# Altium PCB HAT_ID02_IMU.PcbDoc
Units mil, origin at the board's own origin, x right, y up, seen from the top; angles counter-clockwise.
Board outline 2559.11 x 2204.72 mil, 2 copper layers (Top Layer, Bottom Layer); 30 components, 28 nets, 144 pads, 22 vias.
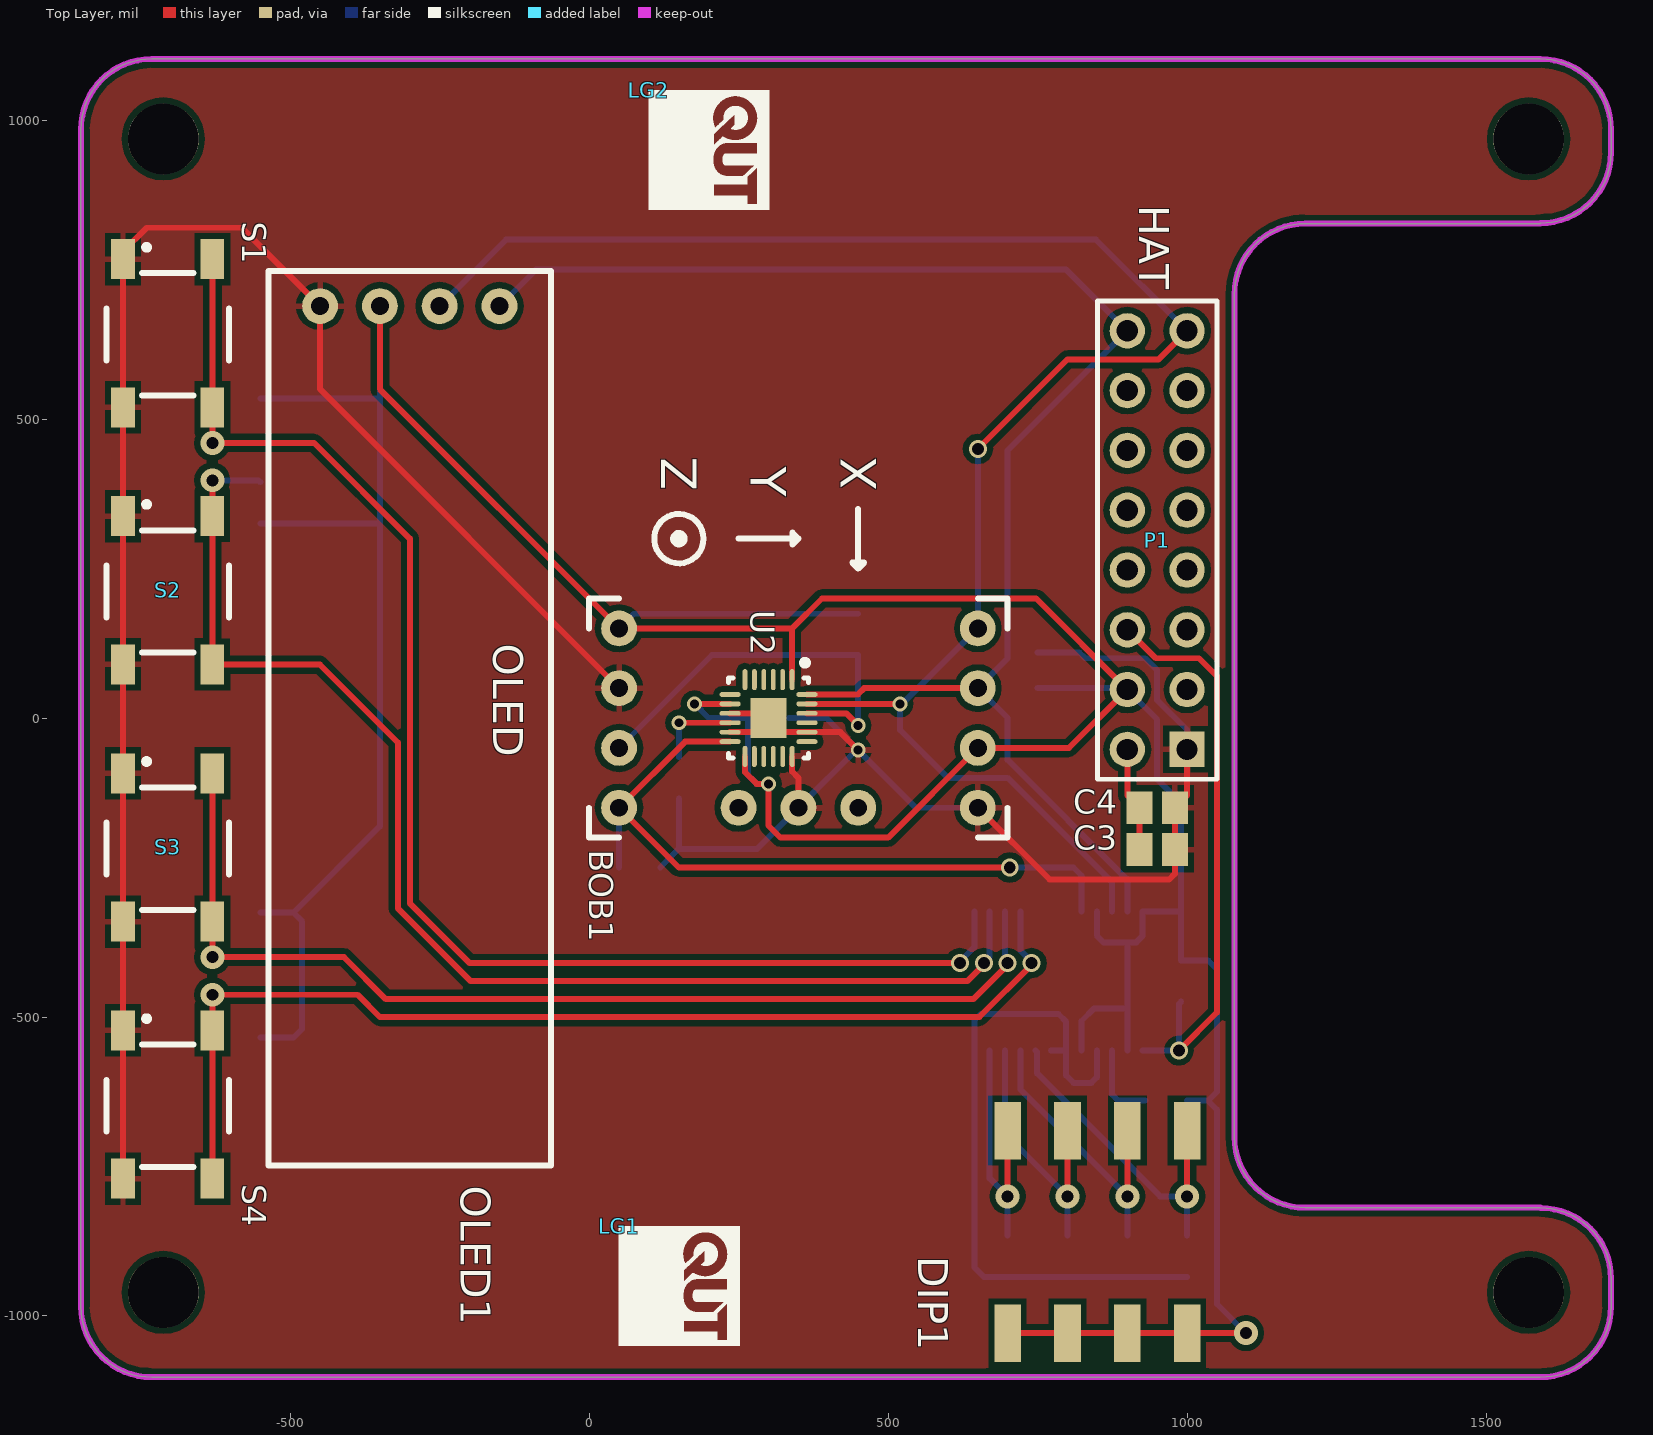
[diagram p0: Top Layer view]
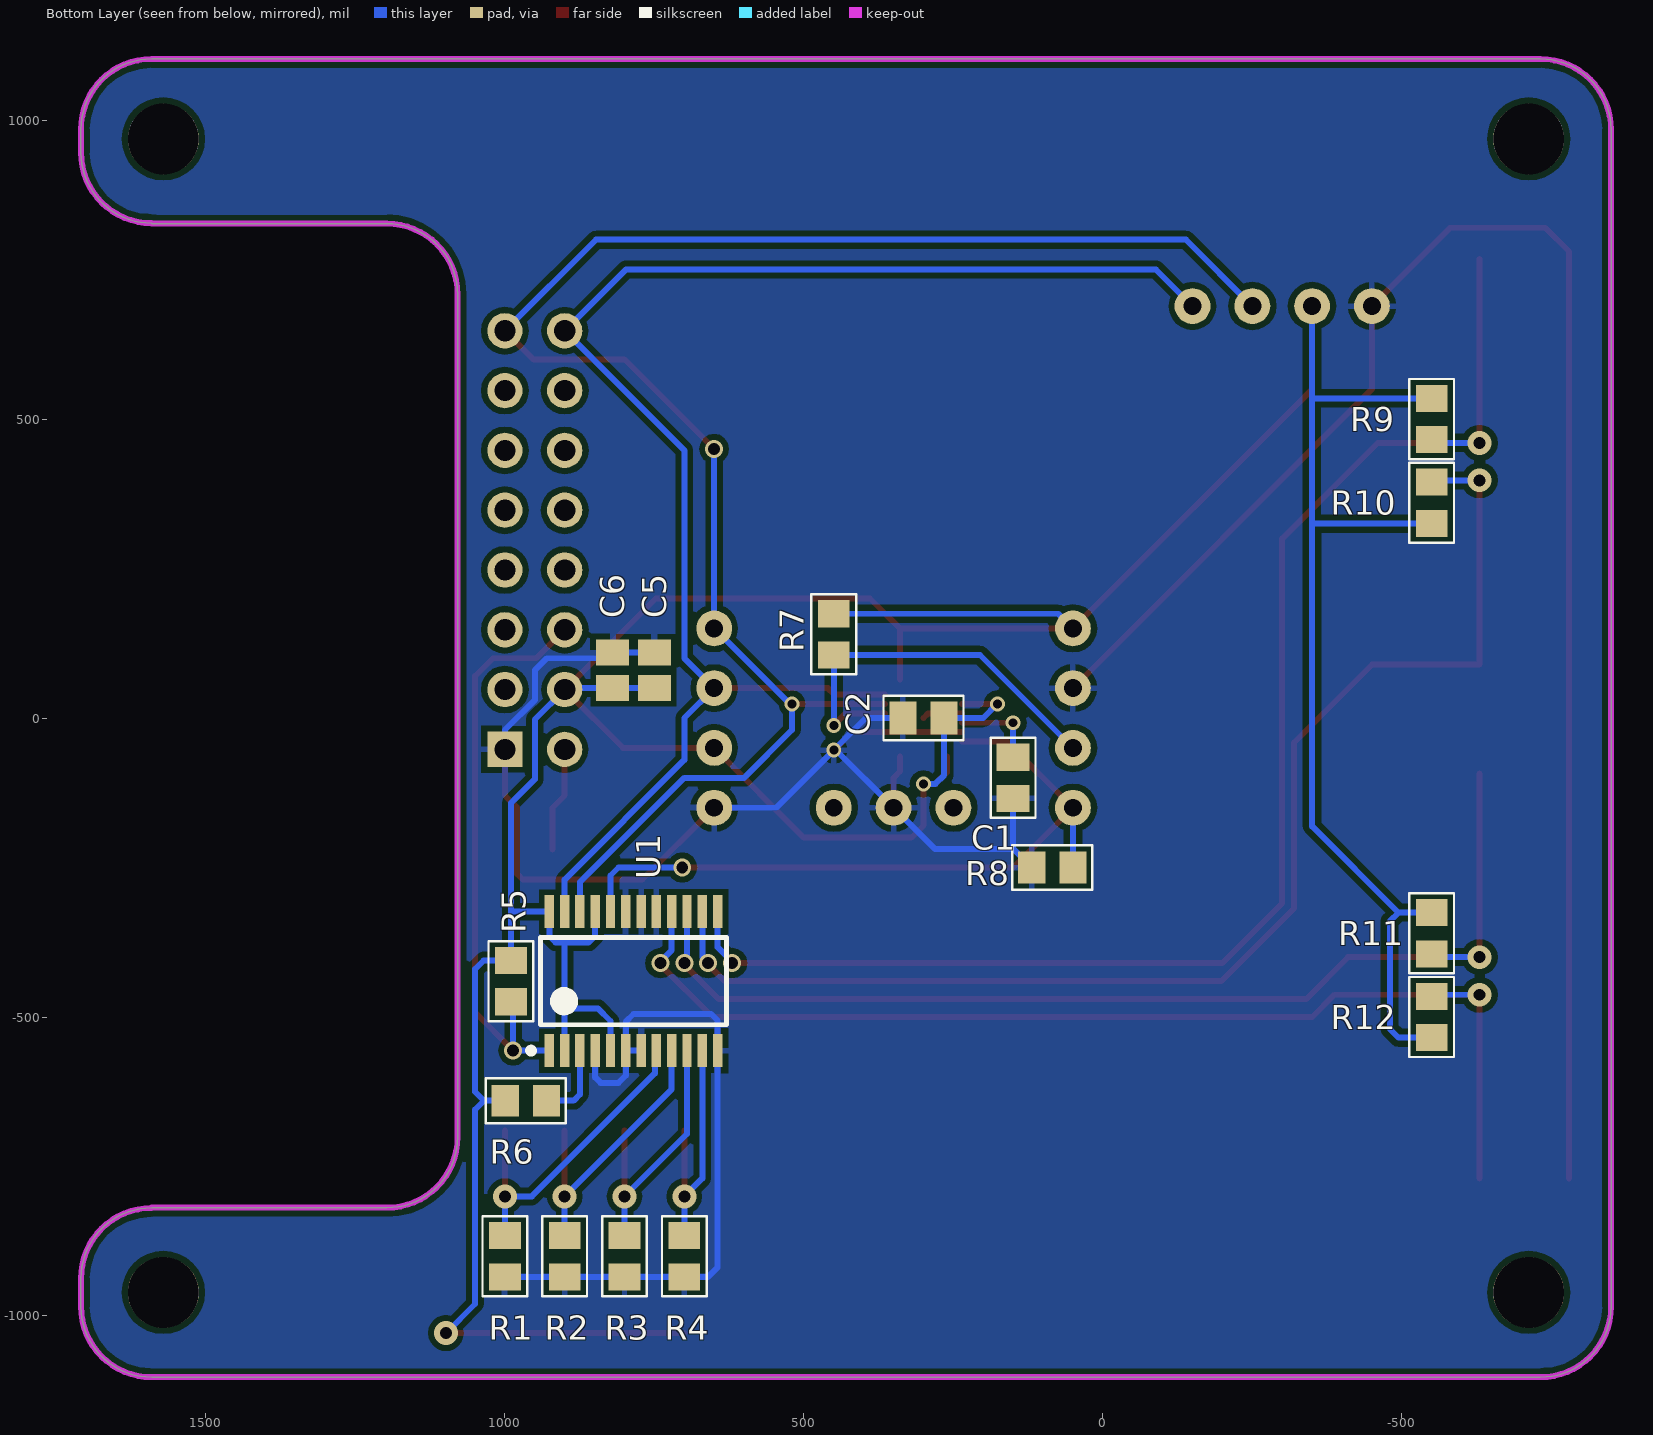
[diagram p1: Bottom Layer view, seen from below]
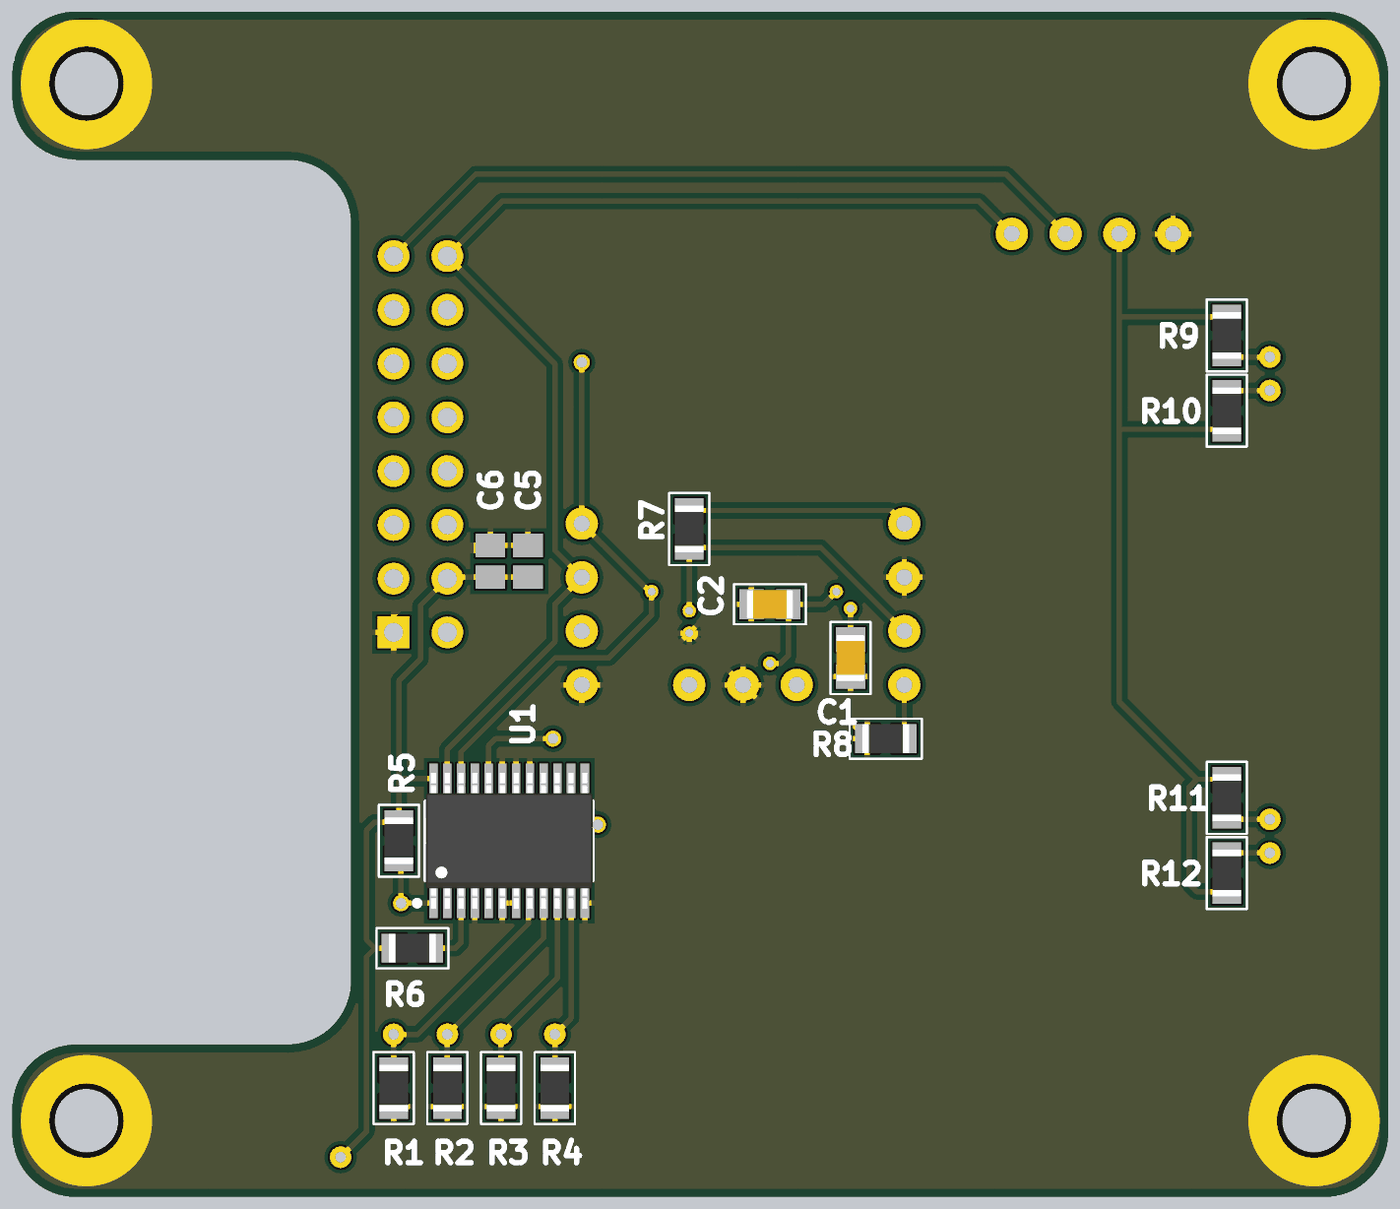
[diagram p2: 3D render of the assembled board from below, using the file's embedded part models]

## Layer stack, top to bottom
Top Solder: solder mask 0.4, Solder Resist, Dk 3.5
Top Layer: signal copper 1.4
Dielectric 1: dielectric 12.6, FR-4, Dk 4.8
Bottom Layer: signal copper 1.4
Bottom Solder: solder mask 0.4, Solder Resist, Dk 3.5

## Board outline
-850,-984.25 -850,984.25 cw(c-731.89,984.25) -731.89,1102.36 1591,1102.36 cw(c1591,984.25) 1709.11,984.25 1709.06,984.25 1709.06,945.75 cw(c1590.94,945.75) 1590.94,827.64 1590.94,826.77 1197.24,826.77 ccw(c1197.24,708.66) 1079.13,708.66 1079.13,-700.79 ccw(c1197.24,-700.79) 1197.24,-818.9 1590.94,-818.9 1590.94,-819.25 cw(c1590.94,-937.36) 1709.06,-937.36 1709.06,-984.25 cw(c1590.94,-984.25) 1590.94,-1102.36 -731.89,-1102.36 cw(c-731.89,-984.25)

## Design rules (kind name [scope] priority, off if disabled: settings)
Clearance [All] p1: gap=10
PolygonConnect [All] p1: connectstyle=Relief reliefconductorwidth=10 reliefentries=4 polygonreliefangle="90 Angle" airgapwidth=10
RoutingVias [All] p1: holewidth=28 width=50 viastyle="Through Hole" minholewidth=28 minwidth=50 maxholewidth=28 maxwidth=50
SolderMaskExpansion [All] p1: expansion=4
Width [All] p1: maxlimit=20 minlimit=8 preferedwidth=10
30 further rules are at their usual default settings.

## Components (designator, comment, footprint, x,y, rotation, side; value= is the part's Value field where it differs from the comment)
BOB1 "BOB MPU-9250" "BOB MPU-9250" 350,-150 r270 top locked
C1 "CAP SMD" CAPC2012X07N 150,-100 r90 bottom
C2 "CAP SMD" CAPC2012X07N 300,0 r180 bottom
C3 "CAP SMD" C0805 950,-220 r180 top
C4 "CAP SMD" C0805 950,-150 r180 top
C5 "CAP SMD" C0805 750,80 r270 bottom
C6 "CAP SMD" C0805 820,80 r270 bottom
DIP1 "DIP Switch (4way)" "DIP SMD" 1000,-1028.58 r0 top locked
LG1 "QUT_Logo" QUT_Logo 50,-850 r270 top
LG2 "QUT_Logo" QUT_Logo 100,1050 r270 top
OLED1 "OLED" OLED -300,688.98 r270 top locked
P1 "HAT" HDR2X8 1000,-52.36 r90 top locked
R1 "RES SMD" RESC2012X07N 1000,-900 r90 bottom
R2 "RES SMD" RESC2012X07N 900,-900 r90 bottom
R3 "RES SMD" RESC2012X07N 800,-900 r90 bottom
R4 "RES SMD" RESC2012X07N 700,-900 r90 bottom
R5 "RES SMD" RESC2012X07N 990,-440 r90 bottom
R6 "RES SMD" RESC2012X07N 965,-640 r0 bottom
R7 "RES SMD" RESC2012X07N 450,140 r90 bottom
R8 "RES SMD" RESC2012X07N 84.45,-250 r180 bottom
R9 "RES SMD" RESC2012X07N -550,500 r270 bottom
R10 "RES SMD" RESC2012X07N -550,360 r90 bottom
R11 "RES SMD" RESC2012X07N -550,-360 r270 bottom
R12 "RES SMD" RESC2012X07N -550,-500 r90 bottom
S1 "B1" E-SWITCH-TL3342 -779.61,767.64 r270 top
S2 "B1" E-SWITCH-TL3342 -779.61,337.64 r270 top
S3 "B1" E-SWITCH-TL3342 -779.61,-92.36 r270 top
S4 "B1" E-SWITCH-TL3342 -779.61,-522.36 r270 top
U1 "PCA6416A" TSOP65P640X110-24N 785,-440 r90 bottom
U2 "MPU-9250" INSE-QFN-24-1700X1540TP_M 300,0 r270 top locked

## Footprints (in the part's own frame and the unit in brackets; to place one, negate y for a bottom-side part, rotate by r counter-clockwise, add the part's x,y. Pads: shape width x height; smd on the part's side, far side on the other; paste and mask are expansions set on the pad)
"BOB MPU-9250" [mil]
  round 60 hole 30: 0(-300,300) 1(-200,300) 2(-100,300) 3(0,300) 4(0,100) 5(0,0) 6(0,-100) 7(0,-300) 8(-100,-300) 9(-200,-300) 10(-300,-300)
  silkscreen extent -350,-350 50,350
C0805 [mm] "Chip Capacitor, Body 2.0x1.3mm, IPC High Density"
  rect 1.1x1.4 smd: 1(-0.75,0) 2(0.75,0)
  body extent -1.1,-0.72 1.1,0.72, height 1.4
CAPC2012X07N [mm] "Chip Capacitor, 2-Leads, Body 2.00x1.25mm, IPC Medium Density"
  rect 1.15x1.4 smd: 1(-0.875,0) 2(0.875,0)
  silkscreen extent -1.7,-0.95 1.7,0.95, body extent -1.1,-0.68 1.1,0.67, height 0.7
"DIP SMD" [mm] "Digikey CT2194MST-ND"
  rect 1.13x2.44 smd: 0(-7.62,0) 1(-5.08,0) 2(-2.54,0) 3(0,0) 4(0,8.6) 5(-2.54,8.6) 6(-5.08,8.6) 7(-7.62,8.6)
E-SWITCH-TL3342 [mm]
  rect 1.7x1 smd: 1(0,0) 2(6.3,0) 3(0,3.8) 4(6.3,3.8)
  silkscreen extent -0.6,-0.7 5.8,4.5, body extent 0,-0.7 6.4,4.5, height 1.54
HDR2X8 [mm] "Connector; Header; 8x2 Position"
  rect 1.5x1.5 hole 0.9: 1(0,0)
  round 1.5 hole 0.9: 2(0,2.54) 3(2.54,0) 4(2.54,2.54) 5(5.08,0) 6(5.08,2.54) 7(7.62,0) 8(7.62,2.54) 9(10.16,0) 10(10.16,2.54) 11(12.7,0) 12(12.7,2.54) 13(15.24,0) 14(15.24,2.54) 15(17.78,0) 16(17.78,2.54)
  silkscreen extent -1.27,-1.27 19.05,3.81
INSE-QFN-24-1700X1540TP_M [mm] "QFN, 24-Leads, Body 3.1x3.1mm, Pitch 0.40mm, Thermal Pad 1.54x1.70mm, IPC Low Density"
  oval 0.9x0.2 smd: 1(-1.632,1) 2(-1.632,0.6) 3(-1.632,0.2) 4(-1.632,-0.2) 5(-1.632,-0.6) 6(-1.632,-1) 13(1.632,-1) 14(1.632,-0.6) 15(1.632,-0.2) 16(1.632,0.2) 17(1.632,0.6) 18(1.632,1)
  oval 0.2x0.9 smd: 7(-1,-1.632) 8(-0.6,-1.632) 9(-0.2,-1.632) 10(0.2,-1.632) 11(0.6,-1.632) 12(1,-1.632) 19(1,1.632) 20(0.6,1.632) 21(0.2,1.632) 22(-0.2,1.632) 23(-0.6,1.632) 24(-1,1.632)
  rect 1.7x1.54 smd: 25(0,0)
  silkscreen extent -2.47,-1.7 1.7,1.7, body extent -1.55,-1.55 1.55,1.55, height 1.05
OLED [mil]
  round 60 hole 30: 1(0,-150) 2(0,-50) 3(0,50) 4(0,150)
  silkscreen extent -59,-236 1437,236
QUT_Logo [mil]
  silkscreen extent 0,0 200,202
RESC2012X07N [mm] "Chip Resistor, 2-Leads, Body 2.00x1.25mm, IPC Medium Density"
  rect 1.15x1.35 smd: 1(-0.875,0) 2(0.875,0)
  silkscreen extent -1.7,-0.95 1.7,0.95, body extent -1.1,-0.67 1.1,0.67, height 0.7
TSOP65P640X110-24N [mm] "TSOP, 24-Leads, Body 7.80x4.40mm, Pitch 0.65mm, IPC Medium Density"
  rect 1.4x0.4 smd: 1(-2.95,3.575) 2(-2.95,2.925) 3(-2.95,2.275) 4(-2.95,1.625) 5(-2.95,0.975) 6(-2.95,0.325) 7(-2.95,-0.325) 8(-2.95,-0.975) 9(-2.95,-1.625) 10(-2.95,-2.275) 11(-2.95,-2.925) 12(-2.95,-3.575) 13(2.95,-3.575) 14(2.95,-2.925) 15(2.95,-2.275) 16(2.95,-1.625) 17(2.95,-0.975) 18(2.95,-0.325) 19(2.95,0.325) 20(2.95,0.975) 21(2.95,1.625) 22(2.95,2.275) 23(2.95,2.925) 24(2.95,3.575)
  silkscreen extent -3.07,-3.95 1.85,4.47, body extent -3.2,-3.95 3.2,3.95, height 1.1

## Part data
C1 C2 C3 C4 C5 C6: "Surface mount capacitor"
P1: library part "Header 8X2", "Header, 8-Pin, Dual row"
R1 R2 R3 R4 R5 R6 R7 R8 R9 R10 R11 R12: "0805 surface mount resistor"
S1 S2 S3 S4: library part E-SWITCH-PUSHBUTTON, "TL 3342 surface mount pushbutton"
U1: library part PCA6416APW, "Low-voltage translating 16-bit I2C I/O port expander"
U2: library part CMP-2100-03657-1, "9-axis MotionTracking device, 2.4 to 3,6 V, -40 to 85 degC, 24-Pin QFN, RoHS, Tape and Reel"

## Free pads (board coordinates)
  round 118.11 hole 118.11 unplated mask+62.99: 0(-712.2,-960.63) 1(1571.26,-960.63) 2(1571.26,968.5) 3(-712.2,968.5)

## Via types
v1: diameter 40, hole 20, Top Layer to Bottom Layer, 9 vias
v2: diameter 30, hole 20, Top Layer to Bottom Layer, 7 vias
v3: diameter 25, hole 15, Top Layer to Bottom Layer, 6 vias

## Nets (pads, with @x,y where several pads share a name; then routed paths per layer and width w, separated by ;. In a path a pad name is that pad's centre, name@x,y a point inside that pad or via, vN(x,y) a via of type N, cw(c..) or ccw(c..) an arc to the next point about the centre after c; other vN are vias at no path point)
3V3: BOB1.2 BOB1.10 C2.2 C5.2 C6.2 DIP1.0 DIP1.1 DIP1.2 DIP1.3 OLED1.2 P1.4 R5.2 R6.2 R7.2 R9.1 R10.1 R11.1 R12.1 U1.2 U1.5 U1.21 U1.24 U2.1 U2.8 U2.13 | length 7419.3
  Top Layer w10: OLED1.2 -350,550 BOB1.10 339.37,150 ; v3(176.38,23.62) U2.8 ; U2.13 260.63,-90.63 280,-110 v3(300,-110) 300,-180 320,-200 500,-200 BOB1.2 802.36,-50 P1.4 747.64,200 389.37,200 339.37,150 ; U2.1 339.37,150 ; DIP1.0 DIP1.1 DIP1.2 DIP1.3 v1(1098.58,-1028.58)
  Bottom Layer w10: R12.1 -494.45,-534.45 -480,-520 -480,-340 -494.45,-325.55 ; R11.1 -494.45,-325.55 ; R10.1 -350,325.55 ; R9.1 -350,534.45 ; OLED1.2 -350,534.45 ; BOB1.10 74.45,174.45 R7.2 ; v3(176.38,23.62) 200,0 C2.2 265.55,-95.55 280,-110 v3(300,-110) ; C5.2 C6.2 897.17,50.47 P1.4 950,-2.36 950,-102.36 990,-142.36 990,-323.86 ; U1.5 823.39,-506.61 844.45,-485.55 900.16,-485.55 ; U1.21 848.98,-363.98 860,-375 900,-375 ; U1.2 900.16,-485.55 ; R6.2 1035,-640 ; v1(1098.58,-1028.58) 1050,-980 1050,-655 1035,-640 ; -494.45,-325.55 -350,-181.1 -350,325.55 ; -350,325.55 -350,534.45 ; 900,-375 900.16,-375.16 900.16,-485.55 ; 900,-375 915,-375 925.75,-364.25 U1.24 990,-323.86 ; 990,-323.86 R5.2 1035.55,-405.55 1050,-420 1050,-625 1035,-640
5V0: C3.2 C4.2 P1.2 | length 176.1
  Top Layer w10: P1.2 900,-129.53 C4.2 C3.2
BTN0: R9.2 S1.3 S1.4 U1.13 | length 2451.5
  Top Layer w10: S1.3 S1.4 v1(-630,460) -460,460 -300,300 -300,-310 -200,-410 v2(620,-410)
  Bottom Layer w10: v1(-630,460) R9.2@-550,460 ; v2(620,-410) 620,-407.57 644.25,-383.32 U1.13
BTN1: R10.2 S2.3 S2.4 U1.14 | length 2164.9
  Top Layer w10: S2.3 S2.4 -450.39,89.61 -320,-40.79 -320,-318.28 -198.28,-440 632.43,-440 660,-412.43 v2(660,-410) ; S2.3@-630,338.03 v1(-630,397.64)
  Bottom Layer w10: v1(-630,397.64) -553.19,397.64 R10.2 ; v2(660,-410) 669.84,-400.16 U1.14
BTN2: R11.2 S3.3 S3.4 U1.15 | length 1860.9
  Top Layer w10: S3.3 S3.4 v1(-630,-400) -410,-400 -340,-470 642.43,-470 700,-412.43 v2(700,-410)
  Bottom Layer w10: v1@-620,-400 R11.2@-540,-400 ; U1.15 695.43,-405.43 v2(700,-410)
BTN3: R12.2 S4.3 S4.4 U1.16 | length 1905.8
  Top Layer w10: S4.4 S4.3 v1(-630,-462.76) -387.24,-462.76 -350,-500 652.43,-500 740,-412.43 v2(740,-410)
  Bottom Layer w10: v1(-630,-462.76) R12.2@-550,-462.76 ; U1.16 721.02,-388.6 740,-407.57 v2(740,-410)
DIP0: DIP1.4 R1.2 U1.8 | length 550.7
  Top Layer w10: v1(1000,-800) DIP1.4
  Bottom Layer w10: U1.8 749.33,-558.86 749.33,-594.33 955,-800 v1(1000,-800) R1.2
DIP1: DIP1.5 R2.2 U1.9 | length 493.5
  Top Layer w10: v1(900,-800) DIP1.5
  Bottom Layer w10: U1.9 721.02,-621.02 v1(900,-800) R2.2
DIP2: DIP1.6 R3.2 U1.10 | length 462.7
  Top Layer w10: v1(800,-800) DIP1.6
  Bottom Layer w10: U1.10 695.43,-695.43 v1(800,-800) R3.2
DIP3: DIP1.7 R4.2 U1.11 | length 431.9
  Top Layer w10: v1(700,-800) DIP1.7
  Bottom Layer w10: U1.11 669.84,-769.84 v1(700,-800) R4.2
GND: BOB1.3 BOB1.5 BOB1.9 C1.1 C2.1 C3.1 C4.1 C5.1 C6.1 OLED1.1 P1.1 R1.1 R2.1 R3.1 R4.1 R8.1 S1.1 S1.2 S2.1 S2.2 S3.1 S3.2 S4.1 S4.2 U1.4 U1.6 U1.7 U1.12 U1.17 U1.18 U1.19 U2.9 U2.11 U2.18 U2.20 U2.25 | length 6181.6
  Top Layer w10: S4.2 S4.1 S3.2 S3.1 S2.2 S2.1 S1.2 S1.1 -779.61,780.39 -740,820 -581.02,820 OLED1.1 -450,550 BOB1.9 ; U2.11 U2.20 420,-23.62 v3(450,-53.62) ; U2.9 292.13,7.87 U2.25 ; U2.18 339.37,-89.37 350,-100 BOB1.5 ; BOB1.3 770,-270 970,-270 979.53,-260.47 C3.1 C4.1 1000,-129.53 P1.1
  Bottom Layer w10: R8.1 150,-218.9 ; C1.1 150,-218.9 ; C2.1 396.38,0 v3@448.19,-51.81 ; v3@450,-50 v3@448.19,-51.81 ; BOB1.3 546.38,-150 v3(450,-53.62) v3@448.19,-51.81 ; C5.1 C6.1 829.53,100 930,100 950,80 950,30 1000,-20 P1.1 ; U1.7 U1.6 ; U1.4 848.98,-601.02 840,-610 810,-610 797.8,-597.8 U1.6 ; R1.1 R2.1 R3.1 R4.1 660,-934.45 644.25,-918.7 U1.12 644.25,-505.75 655,-495 785,-495 797.8,-507.8 U1.6 ; 150,-218.9 281.1,-218.9 BOB1.5 v3@448.19,-51.81
HAT_00: P1.3
HAT_01: P1.5
HAT_02: P1.7
HAT_03: P1.9
HAT_04: P1.12
HAT_05: P1.10
HAT_06: P1.8
HAT_07: P1.6 R5.1 U1.1 | length 978.4
  Top Layer w10: P1.6 947.64,100 1020,100 1050,70 1050,-492.28 v2(986.14,-556.14)
  Bottom Layer w10: U1.1 v2(986.14,-556.14) 986.14,-478.31 R5.1
INT_IMU: BOB1.7 R8.2 U1.20 U2.12 | length 1212.4
  Top Layer w10: U2.12 160.63,-39.37 BOB1.7 150,-250 v2(703.39,-250)
  Bottom Layer w10: R8.2 BOB1.7 ; v2(703.39,-250) 810,-250 823.39,-263.39 U1.20
MISO: P1.14
MOSI: P1.13
NCS: BOB1.8 R7.1 U2.22 | length 676.1
  Top Layer w10: U2.22 430,7.87 v3(450,-12.13)
  Bottom Layer w10: BOB1.8 205.55,105.55 R7.1 v3(450,-12.13)
NetC1_2: C1.2 U2.10 | length 143.4
  Top Layer w10: v3(150,-7.87) U2.10
  Bottom Layer w10: C1.2 v3(150,-7.87)
NetR6_1: R6.1 U1.3 | length 133.7
  Bottom Layer w10: U1.3 874.57,-629.57 885,-640 R6.1
SCL: BOB1.0 OLED1.3 P1.15 U1.22 U2.23 | length 2984.3
  Top Layer w10: U2.23 v3(520,23.62) ; v2(650,450) 800,600 952.36,600 P1.15 P1.15@997.64,647.64
  Bottom Layer w10: OLED1.3 -138.98,800 847.64,800 P1.15 ; v2(650,450) BOB1.0 523.62,23.62 v3(520,23.62) 520,-20 600,-100 700,-100 874.57,-274.57 U1.22
SCLK: P1.11
SDA: BOB1.1 OLED1.4 P1.16 U1.23 U2.24 | length 2586.5
  Top Layer w10: U2.24 449.37,39.37 460,50 BOB1.1
  Bottom Layer w10: OLED1.4 -88.98,750 797.64,750 P1.16 700,447.64 700,100 BOB1.1 700,0 700,-70 900.16,-270.16 U1.23
pads on no net: BOB1.4 BOB1.6 U2.2 U2.3 U2.4 U2.5 U2.6 U2.7 U2.14 U2.15 U2.16 U2.17 U2.19 U2.21

## Polygon pours and split planes (outlines as drawn)
GND on Bottom Layer "Bottom Layer-GND" (solid, pour order 0): -850,-1100 -850,1100 1709.11,1100 1709.11,827.59 1197.24,826.77 1110.85,789.2 1070.24,699.76 1079.13,20 1079.13,-700.79 1119.93,-790.08 1197.24,-818.9 1709.11,-819.85 1709.11,-1100
GND on Top Layer "TOP Layer-GND" (solid, pour order 4): -850,-1100 -850,1100 1709.11,1100 1709.11,827.59 1197.24,826.77 1110.85,789.2 1070.24,699.76 1079.13,20 1079.13,-700.79 1119.93,-790.08 1197.24,-818.9 1709.11,-819.85 1709.11,-1100

## Keep-outs
Keep-Out Layer:
  lines w10: 1590.94,-819.25 cw(c1590.94,-937.36) 1709.06,-937.36 1709.06,-984.25 cw(c1590.94,-984.25) 1590.94,-1102.36 -731.89,-1102.36 cw(c-731.89,-984.25) -850,-984.25 -850,-922.64 -850,922.64 -850,984.25 cw(c-731.89,984.25) -731.89,1102.36 1591,1102.36 cw(c1591,984.25) 1709.11,984.25 ; 1590.94,-818.9 1197.24,-818.9 cw(c1197.24,-700.79) 1079.13,-700.79 1079.13,708.66 cw(c1197.24,708.66) 1197.24,826.77 1590.94,826.77 ; 1590.94,827.64 ccw(c1590.94,945.75) 1709.06,945.75 1709.06,984.25

## Silkscreen, mask and mechanical layers (free items; w line width, h text height)
Top Overlay:
  circle w15: c150,300 r7
  circle w10: c150,300 r41.23
  lines w10: 250,300 350,300 ; 450,350 450,250 ; 350,300 340,290 340,310 350,300 ; 450,250 460,260 440,260 450,250
  text "Y" at 270,420 h60 r270
  text "Z" at 180,380 h60 r90
  text "X" at 480,380 h60 r90
Mechanical 1:
  lines w10: 1590.94,-819.25 cw(c1590.94,-937.36) 1709.06,-937.36 1709.06,-984.25 cw(c1590.94,-984.25) 1590.94,-1102.36 -731.89,-1102.36 cw(c-731.89,-984.25) -850,-984.25 -850,-922.64 -850,922.64 -850,984.25 cw(c-731.89,984.25) -731.89,1102.36 1591,1102.36 cw(c1591,984.25) 1709.11,984.25 ; 1590.94,-818.9 1197.24,-818.9 cw(c1197.24,-700.79) 1079.13,-700.79 1079.13,708.66 cw(c1197.24,708.66) 1197.24,826.77 1590.94,826.77 ; 1590.94,827.64 ccw(c1590.94,945.75) 1709.06,945.75 1709.06,984.25